# Altium PCB Hall-Effect-Switch.PcbDoc
Units mm, origin at the board's own origin, x right, y up, seen from the top; angles counter-clockwise.
Board outline 24.98 x 23.67 mm, 3 copper layers (Top Layer, Ground Plane, Bottom Layer), stack 0.488 mm thick; 17 components, 11 nets, 47 pads, 10 vias.
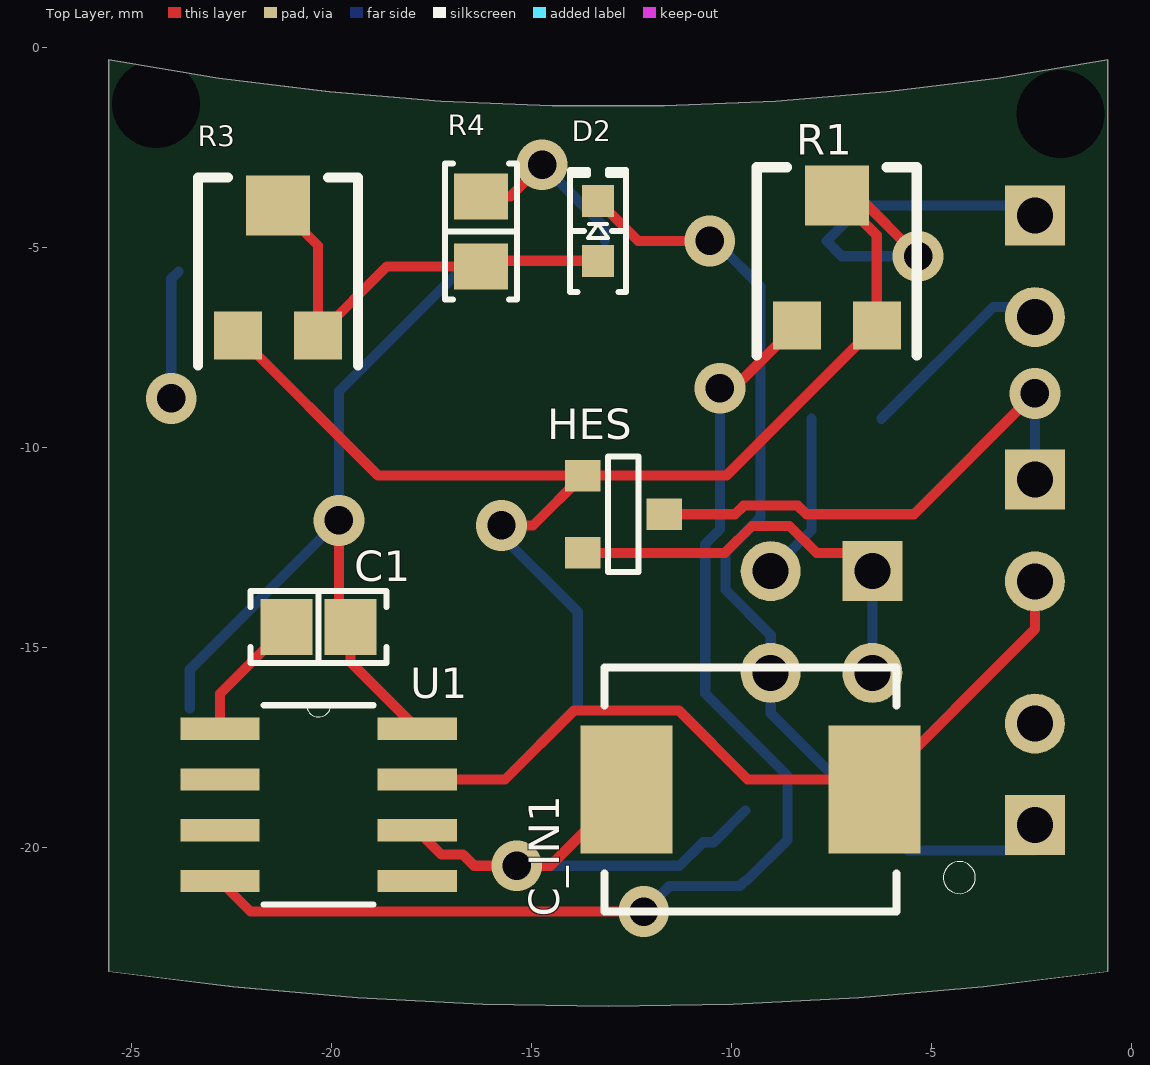
[diagram p0: Top Layer view]
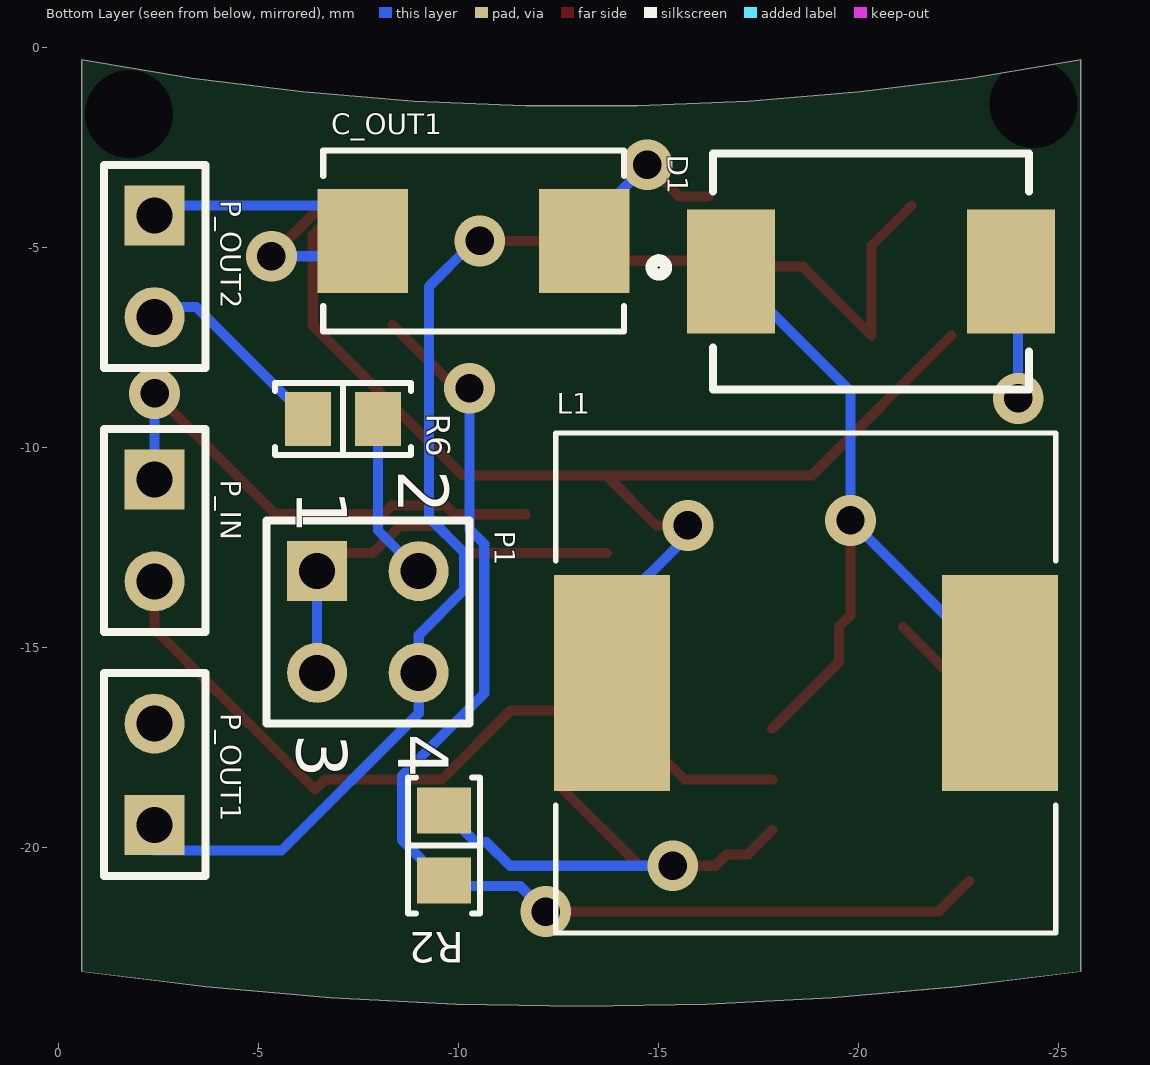
[diagram p1: Bottom Layer view, seen from below]
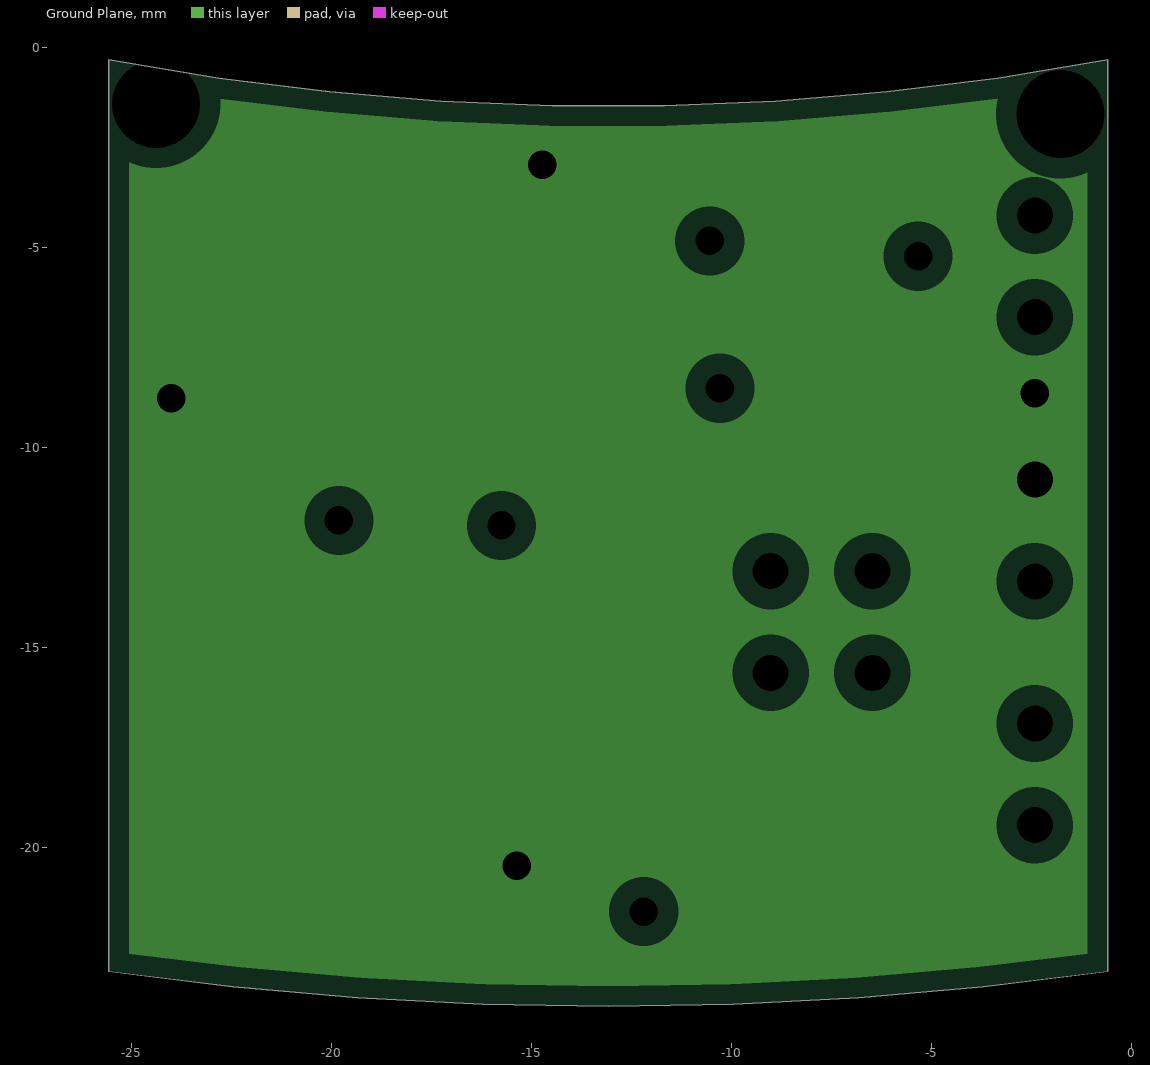
[diagram p2: Ground Plane, clearances drawn from the general rule]

## Layer stack, top to bottom
Top Solder: solder mask 0.0102, Solder Resist, Dk 3.5
Top Layer: signal copper 0.0356
Dielectric 1: core 0.254, FR-4, Dk 4.2
Ground Plane: plane copper 0.036, net GND
Dielectric 2: prepreg 0.127, Dk 4.2
Bottom Layer: signal copper 0.0356
Bottom Solder: solder mask 0.0102, Solder Resist, Dk 3.5

## Board outline
-25.57,-0.295 -25.57,-23.089 -22.461,-23.47 -19.341,-23.742 -16.213,-23.905 -13.081,-23.96 -9.949,-23.905 -6.821,-23.742 -3.701,-23.47 -0.592,-23.089 -0.592,-0.295 -3.345,-0.754 -6.115,-1.1 -8.896,-1.33 -11.685,-1.446 -14.477,-1.446 -17.266,-1.33 -20.047,-1.1 -22.817,-0.754

## Design rules (kind name [scope] priority, off if disabled: settings)
Clearance [All] p1: gap=0.254 ignorepadtopadclearanceinfootprint=FALSE except(0: Arc-Hole Track-Hole SMDPad-Hole THPad-Hole Via-Hole Fill-Hole Poly-Hole Region-Hole Text-Hole)
PlaneClearance [All] p1: clearance=0.508
PlaneConnect [All] p1: planeconnectstyle=Relief reliefexpansion=0.508 reliefentries=4 reliefconductorwidth=0.254 reliefairgap=0.254
PolygonConnect [All] p1: connectstyle=Relief reliefconductorwidth=0.254 reliefentries=4 polygonreliefangle="90 Angle" airgapwidth=0.254
RoutingVias [All] p1: holewidth=0.711 width=1.27 viastyle="Through Hole" minholewidth=0.711 minwidth=1.27 maxholewidth=0.711 maxwidth=1.27
SMDNeckDown [All] p1: percent=50.000
SolderMaskExpansion [All] p1: expansion=0.102
Width [All] p1: maxlimit=0.254 minlimit=0.254 preferedwidth=0.254
28 further rules are at their usual default settings.

## Components (designator, comment, footprint, x,y, rotation, side; value= is the part's Value field where it differs from the comment)
C1 "10000pF" "CAP 0805/2012" -20.32,-14.478 r0 top
C_IN1 "22 µF" CAPMP7361X375 -9.525,-18.542 r180 top
C_OUT1 "47 uF" CAPCP7343X430N -10.389,-4.826 r180 bottom
D1 "Schottky_diode" DIOM7959X250N -20.32,-5.588 r180 bottom
D2 "Red" "LED 0603/1608 RED" -13.335,-4.572 r90 top value=Green
HES "" US5881LSE-AAA-000-RE -12.7,-11.684 r90 top (schematic designator "hall effect sensor1")
L1 "SRR1260-680M" SRR1260-680M -18.693,-15.875 r180 bottom value="68 µH"
P1 "Jumper Header" HDR2X2 -6.477,-13.081 r270 bottom
P_IN "Header 2" HDR1X2 -2.413,-10.795 r270 bottom
P_OUT1 "Header Odroid" HDR1X2 -2.413,-19.431 r90 bottom
P_OUT2 "Header Relay" HDR1X2 -2.413,-4.191 r270 bottom (schematic designator P_OUT)
R1 "8.9K" *35WR -7.366,-5.334 r0 top value=10K
R2 "1k" "RES 0805/2012" -9.652,-19.939 r270 bottom
R3 "8.9K" *35WR -21.336,-5.588 r0 top value=10K
R4 "1k" "RES 0805/2012" -16.256,-4.586 r270 top
R6 "1k" "RES 0805/2012" -7.126,-9.271 r0 bottom
U1 "LM2674MX-12/NOPB" LM2674MX-12_NOPB -20.32,-18.923 r0 top

## Footprints (in the part's own frame and the unit in brackets; to place one, negate y for a bottom-side part, rotate by r counter-clockwise, add the part's x,y. Pads: shape width x height; smd on the part's side, far side on the other; paste and mask are expansions set on the pad)
*35WR [mm]
  rect 1.2x1.2 smd: 1(-1,-1.6) 3(1,-1.6)
  rect 1.6x1.5 smd: 2(0,1.65)
  silkscreen extent -2,-2.35 2,2.35
"CAP 0805/2012" [mm] "Chip Capacitor, 2-Leads, Body 2.00x1.20mm, IPC Medium Density"
  rect 1.3x1.4 smd: 1(-0.8,0) 2(0.8,0)
  silkscreen extent -1.7,-0.9 1.7,0.9, body extent -1,-0.64 1,0.64, height 1.26
CAPCP7343X430N [mil]
  rect 89x102 smd: 1(-109,0) 2(109,0)
  silkscreen extent -148,-89 148,89
CAPMP7361X375 [mm]
  rect 2.3x3.2 smd: 1(-3.1,0) 2(3.1,0)
  silkscreen extent -5.63,-3.05 3.65,3.05
DIOM7959X250N [mm]
  rect 2.2x3.1 smd: A(3.5,0) C(-3.5,0)
  silkscreen extent -5.48,-2.95 3.95,2.95
HDR1X2 [mm] "Connector; Header; 2 Position"
  rect 1.5x1.5 hole 0.9: 1(0,0)
  round 1.5 hole 0.9: 2(2.54,0)
  silkscreen extent -1.27,-1.27 3.81,1.27
HDR2X2 [mm] "Connector; Header; 2x2 Position"
  rect 1.5x1.5 hole 0.9: 1(0,0)
  round 1.5 hole 0.9: 2(0,2.54) 3(2.54,0) 4(2.54,2.54)
  silkscreen extent -1.27,-1.27 3.81,3.81
"LED 0603/1608 RED" [mm] "Chip Diode, 2-Leads, Body 1.60x0.80mm, IPC Medium Density"
  rect 0.8x0.8 smd: 1(-0.75,0) 2(0.75,0)
  silkscreen extent -1.52,-0.7 1.52,0.7, body extent -0.8,-0.4 0.8,0.4, height 0.53
LM2674MX-12_NOPB [mil]
  rect 78x22 smd: 1(-97,75) 2(-97,25) 3(-97,-25) 4(-97,-75) 5(97,-75) 6(97,-25) 7(97,25) 8(97,75)
  silkscreen extent -54,-98 54,99
"RES 0805/2012" [mm] "Chip Resistor, 2-Leads, Body 2.00x1.25mm, IPC Medium Density"
  rect 1.15x1.35 smd: 1(-0.875,0) 2(0.875,0)
  silkscreen extent -1.7,-0.9 1.7,0.9, body extent -0.95,-0.62 1.05,0.63, height 0.6
SRR1260-680M [mm]
  rect 2.9x5.4 smd: 1(-4.85,0) 2(4.85,0)
  silkscreen extent -6.25,-6.25 6.25,6.25
US5881LSE-AAA-000-RE [mil]
  rect 31x35 smd: 1(39,40) 2(-37,40) 3(1,-40)
  silkscreen extent -56,-15 58,15

## Part data
C1: library part C2012C0G1H103J060AA, "CAP CER 10000PF 50V C0G 0805", Device Package="0805 (2012 Metric)", Manufacturer="TDK Corporation", Supplier Part Number 1=445-7519-2-ND, TemperatureCoefficient="C0G, NP0", TemperatureRange="-55C ~ 125C", Tolerance=5%, Voltage=50V, ComponentLink1Description=Datasheet, ComponentLink1URL=https://product.tdk.com/info/en/catalog/datasheets/mlcc_commercial_general_en.pdf, ComponentLink2Description="Digi-Key listing", ComponentLink2URL=http://digikey.com/product-detail/en/C2012C0G1H103J060AA/445-7519-2-ND/2732954, PartId=4634, Part Number=C2012C0G1H103J060AA, Price=0,0876, Supplier 1=Digi-Key, Type=-
C_IN1: library part CAPMP7361X375, Package=7361, Supplier Part Number 1=478-5811-1-ND, Tolerance="± 10%", Voltage Rating=50V, ComponentLink1Description="Manufacturer Link", ComponentLink1URL=https://www.digikey.com/en/supplier-centers/a/avx, ComponentLink2Description=Datasheet, ComponentLink2URL=http://datasheets.avx.com/TAJ.pdf, Part Number=CAPMP7361X375, Supplier 1=Digi-Key
C_OUT1: library part CAPCP7343X430N, Package=7343, Supplier Part Number 1=478-5760-2-ND, Tolerance="± 10%", Voltage Rating=25V, ComponentLink1Description="Manufacturer Link", ComponentLink1URL=https://www.digikey.com/en/supplier-centers/a/avx, ComponentLink2Description=Datasheet, ComponentLink2URL=http://datasheets.avx.com/trj.pdf, Part Number=CAPCP7343X430N, Supplier 1=Digi-Key
D1: library part DIOM7959X250N, "General-purpose Schottky diodes", Supplier Part Number 1=SK35-FDICT-ND, ComponentLink1Description="Manufacturer Link", ComponentLink1URL=https://www.digikey.no/en/supplier-centers/d/diodes, ComponentLink2Description=Datasheet, ComponentLink2URL=https://media.digikey.com/pdf/Data%20Sheets/Diodes%20PDFs/SK32-SK36.pdf, Part Number=DIOM7959X250N, Supplier 1=Digi-key
D2: library part LTST-C191KRKT, "LED RED CLEAR 0603 SMD", Current (Test)=20mA, Device Package="0603 (1608 Metric)", Manufacturer="Lite-On Inc.", Supplier Part Number 1=160-1447-2-ND, Voltage Forward=2V, Colour=Red, ComponentLink1Description=Datasheet, ComponentLink1URL=http://optoelectronics.liteon.com/upload/download/DS22-2000-223/S_110_LTST-C191KRKT.pdf, ComponentLink2Description="Digi-Key Listing", ComponentLink2URL=http://www.digikey.ca/product-detail/en/LTST-C191KRKT/160-1447-2-ND/386837, Lens Transparency=Clear, Millicandela=54mcd, PartId=7050, Part Number=LTST-C191KRKT, Price=0,0521, Supplier 1=Digi-Key, Viewing Angle=130
HES: library part US5881LSE-AAA-000-RE, "Digital Switch Unipolar Switch Open Drain Hall Effect SOT-23", Supplier Part Number 1=US5881LSE-AAA-000-RECT-ND, ComponentLink1Description="Manufacturer Link", ComponentLink1URL=https://www.digikey.com/en/supplier-centers/m/melexis, ComponentLink2Description=Datasheet, ComponentLink2URL=https://www.melexis.com/-/media/files/documents/datasheets/us5881-datasheet-melexis.pdf, Part Number=US5881LSE-AAA-000-RE, Supplier 1=Digi-Key
L1: "Ind Power Shielded Wirewound 68uH 20% 100KHz 22Q-Factor Ferrite 2.1A T/R", Package="Nonstandard Bourns", Supplier Part Number 1=SRR1260-680MCT-ND, Availability=Unavailable, ComponentLink1Description="Manufacturer Link", ComponentLink1URL=https://www.digikey.com/en/supplier-centers/b/bourns, ComponentLink2Description=Datasheet, ComponentLink2URL=https://www.bourns.com/docs/Product-Datasheets/SRR1260.pdf, Irms="2.1 A", MF=Bourns, MP=SRR1260-680M, Part Number=SRR1260-680M, Price=None, SnapEDA_Link=https://www.snapeda.com/parts/SRR1260-680M/Bourns/view-part/?ref=snap, Supplier 1=Digi-Key
P1: library part "Header 2X2", "Header, 2-Pin, Dual row", LatestRevisionDate=17-Jul-2002, LatestRevisionNote="Re-released for DXP Platform.", Publisher="Altium Limited"
P_IN: "Header, 2-Pin", LatestRevisionDate=17-Jul-2002, LatestRevisionNote="Re-released for DXP Platform.", Publisher="Altium Limited"
P_OUT1 P_OUT2: library part "Header 2", "Header, 2-Pin", LatestRevisionDate=17-Jul-2002, LatestRevisionNote="Re-released for DXP Platform.", Publisher="Altium Limited"
R1 R3: library part TC33X-2-103E, "Res Trimmer 10K Ohm 25% 0.1W_1/10W_ 1_Elec_/1_Mech_Turn _3 X 3.8mm_ Foot Print SMD Embossed T/R", Package="FakePackage u", Supplier Part Number 1=TC33X-103ECT-ND, ComponentLink1Description="Manufacturer Link", ComponentLink1URL=https://www.digikey.com/product-detail/en/bourns-inc/TC33X-2-103E/TC33X-103ECT-ND/612911?utm_source=snapeda&utm_medium=aggregator&utm_campaign=symbol, ComponentLink2Description=Datasheet, ComponentLink2URL=https://www.bourns.com/docs/Product-Datasheets/TC33.pdf, Digi-Key_Part_Number=TC33X-103ECT-ND, Digi-Key_Purchase_URL=https://www.digikey.com/product-detail/en/bourns-inc/TC33X-2-103E/TC33X-103ECT-ND/612911?utm_source=snapeda&utm_medium=aggregator&utm_campaign=symbol, MF=Bourns, MP=TC33X-2-103E, Part Number=TC33X-2-103E, SnapEDA_Link=https://www.snapeda.com/parts/TC33X-2-103E/Bourns/view-part/?ref=snap, Supplier 1=Digi-Key
R2 R4 R6: library part ERJ-6ENF1001V, "RES SMD 1K OHM 1% 1/8W 0805", Device Package="0805 (2012 Metric)", Manufacturer="Panasonic Electronic Components", PowerRating="0.125W, 1/8W", Supplier Part Number 1=P1.00KCTR-ND, TemperatureCoefficient=100ppm/C, TemperatureRange="-55C ~ 155C", Tolerance=1%, ComponentLink1Description=Datasheet, ComponentLink1URL=http://industrial.panasonic.com/www-cgi/jvcr13pz.cgi?E+PZ+3+AOA0002+ERJ6ENF1001V+7+WW, ComponentLink2Description="Digi-Key listing", ComponentLink2URL=http://digikey.com/product-detail/en/ERJ-6ENF1001V/P1.00KCTR-ND/111281, PartId=1948, Part Number=ERJ-6ENF1001V, Price=0,0073, Supplier 1=Digi-Key, Type="Thick Film"
U1: library part LM2674MX-12_NOPB, "SIMPLE SWITCHER® 40V, 500mA Low Component Count Step-Down Regulator 8-SOIC -40 to 125", Package="SOIC-8 Texas Instruments", Supplier Part Number 1=LM2674MX-12/NOPBCT-ND, Availability=Unavailable, ComponentLink1Description="Manufacturer Link", ComponentLink1URL=https://www.digikey.com/en/supplier-centers/t/texas-instruments, ComponentLink2Description=Datasheet, ComponentLink2URL=http://www.ti.com/lit/ds/symlink/lm2674.pdf, Iout,max=500mA, MF="Texas Instruments", MP=LM2674MX-12/NOPB, Part Number=LM2674MX-12_NOPB, Price=None, SnapEDA_Link=https://www.snapeda.com/parts/LM2674MX-12/NOPB/Texas%20Instruments/view-part/?ref=snap, Supplier 1=Digi-Key, Vin,max=40V, Vin,min=6.5V, Vout,nom=12V

## Free pads (board coordinates)
  round 1.524 hole 2.2: 2(-1.778,-1.651) 3(-24.384,-1.397)

## Via types
v1: diameter 1.27, hole 0.711, Top Layer to Bottom Layer, 10 vias

## Nets (pads, with @x,y where several pads share a name; then routed paths per layer and width w, separated by ;. In a path a pad name is that pad's centre, name@x,y a point inside that pad or via, vN(x,y) a via of type N, cw(c..) or ccw(c..) an arc to the next point about the centre after c; other vN are vias at no path point)
+12V: C_OUT1.1 HES.1 L1.1 P_OUT2.1 R1.2 R1.3 R3.1 | length 41
  Top Layer w0.254: R3.1 -18.831,-10.693 HES.1 ; v1(-15.748,-11.938) -14.961,-11.938 HES.1 ; v1(-5.334,-5.207) -6.857,-3.684 R1.2 -6.366,-4.684 R1.3 -10.125,-10.693 HES.1
  Bottom Layer w0.254: v1@-15.748,-12.192 -13.843,-14.097 L1.1 L1.1@-13.843,-16.51 ; v1(-5.334,-5.207) -7.239,-5.207 C_OUT1.1 -6.731,-3.937 P_OUT2.1@-2.413,-3.937
GND: C_IN1.2 C_OUT1.2 D1.A HES.3 P_IN.1 R2.1 R4.1 U1.6 | length 33.2
  Top Layer w0.254: U1.6 -17.247,-20.168 -16.708,-20.168 -16.428,-20.447 v1(-15.367,-20.447) -14.53,-20.447 C_IN1.2 ; R4.1 -15.522,-3.711 v1(-14.732,-2.921) ; HES.3 -9.912,-11.659 -9.696,-11.442 -8.338,-11.442 -8.122,-11.659 -5.436,-11.659 v1(-2.413,-8.636)
  Bottom Layer w0.254: v1(-24.003,-8.763) -24.003,-5.771 D1.A ; v1(-15.367,-20.447) -11.297,-20.447 -10.708,-19.858 -10.446,-19.858 R2.1 ; v1(-14.732,-2.921) -13.157,-4.496 C_OUT1.2 ; P_IN.1 v1(-2.413,-8.636)
NetC1_1: C1.1 U1.1 | length 3.2
  Top Layer w0.254: U1.1 -22.784,-16.142 C1.1
NetC1_2: C1.2 D1.C L1.2 U1.8 | length 19.7
  Top Layer w0.254: v1(-19.812,-11.811) -19.812,-14.186 C1.2 -19.52,-15.354 U1.8
  Bottom Layer w0.254: L1.2@-23.543,-16.51 L1.2 -23.543,-15.542 v1(-19.812,-11.811) -19.812,-8.58 D1.C
NetC_IN1_1: C_IN1.1 P_IN.2 U1.7 | length 19.8
  Top Layer w0.254: U1.7 -15.66,-18.288 -13.933,-16.561 -11.317,-16.561 -9.59,-18.288 -6.679,-18.288 C_IN1.1 -2.413,-14.53 P_IN.2
NetD2_1: D2.1 R3.2 R3.3 R4.2 | length 11.4
  Top Layer w0.254: R3.2 -20.336,-4.938 R3.3 -18.609,-5.461 R4.2 -16.117,-5.322 D2.1
NetD2_2: D2.2 P1.4 P_OUT1.1 | length 24.2
  Top Layer w0.254: D2.2 -12.331,-4.826 v1(-10.541,-4.826)
  Bottom Layer w0.254: v1@-10.287,-4.953 -9.271,-5.969 -9.271,-11.736 -10.148,-12.613 -10.148,-13.549 -9.017,-14.68 P1.4 -9.017,-16.637 -5.588,-20.066 P_OUT1.1@-2.413,-20.066
"Nethall effect sensor1_2": HES.2 P1.1 P1.3 | length 10.5
  Top Layer w0.254: HES.2 -10.159,-12.624 -9.485,-11.95 -8.549,-11.95 -7.875,-12.624 -6.934,-12.624 P1.1
  Bottom Layer w0.254: P1.3 P1.1
NetP1_2: P1.2 R6.1 | length 4.2
  Bottom Layer w0.254: P1.2 -8.001,-12.065 R6.1
NetP_OUT_2: P_OUT2.2 R6.2 | length 5
  Bottom Layer w0.254: R6.2 -3.457,-6.477 P_OUT2.2@-2.413,-6.477
NetR1_1: R1.1 R2.2 U1.4 | length 30
  Top Layer w0.254: U1.4 -22.022,-21.59 v1(-12.192,-21.59) ; v1(-10.287,-8.509) -9.941,-8.509 R1.1
  Bottom Layer w0.254: v1(-12.192,-21.59) -11.557,-20.955 -9.793,-20.955 R2.2 -9.613,-20.814 -8.596,-19.797 -8.596,-18.201 -10.656,-16.141 -10.656,-12.402 -10.287,-12.033 v1@-10.287,-8.636
pads on no net: P_OUT1.2 U1.2 U1.3 U1.5

## Polygon pours and split planes (outlines as drawn)
GND on Ground Plane (split plane): -22.901,-1.258 -22.891,-1.258 -22.88,-1.261 -20.11,-1.606 -20.1,-1.606 -20.089,-1.608 -17.308,-1.839 -17.297,-1.839 -17.287,-1.84 -14.498,-1.956 -14.487,-1.955 -14.477,-1.956 -11.685,-1.956 -11.675,-1.955 -11.664,-1.956 -8.875,-1.84 -8.865,-1.839 -8.854,-1.839 -6.073,-1.608 -6.062,-1.606 -6.052,-1.606 -3.282,-1.261 -3.271,-1.258 -3.261,-1.258 -1.102,-0.897 -1.102,-22.637 -3.754,-22.962 -6.857,-23.233 -9.967,-23.395 -13.081,-23.449 -16.195,-23.395 -19.305,-23.233 -22.408,-22.962 -25.06,-22.637 -25.06,-0.897

## Text inside footprints (layer, text, board x,y; h text height)
P1: Bottom Overlay "1" at -5.969,-11.049 h1.27 r90; Bottom Overlay "2" at -8.509,-10.541 h1.27 r90; Bottom Overlay "4" at -8.509,-17.145 h1.27 r90; Bottom Overlay "3" at -5.969,-17.145 h1.27 r90